# Altium PCB Power.PcbDoc
Units mil, origin at the board's own origin, x right, y up, seen from the top; angles counter-clockwise.
Board outline 1000 x 3520 mil, 2 copper layers (Top Layer, Bottom Layer); 4 components, 4 nets, 18 pads, 0 vias.
Unrouted connection lines stored in the file: 1.
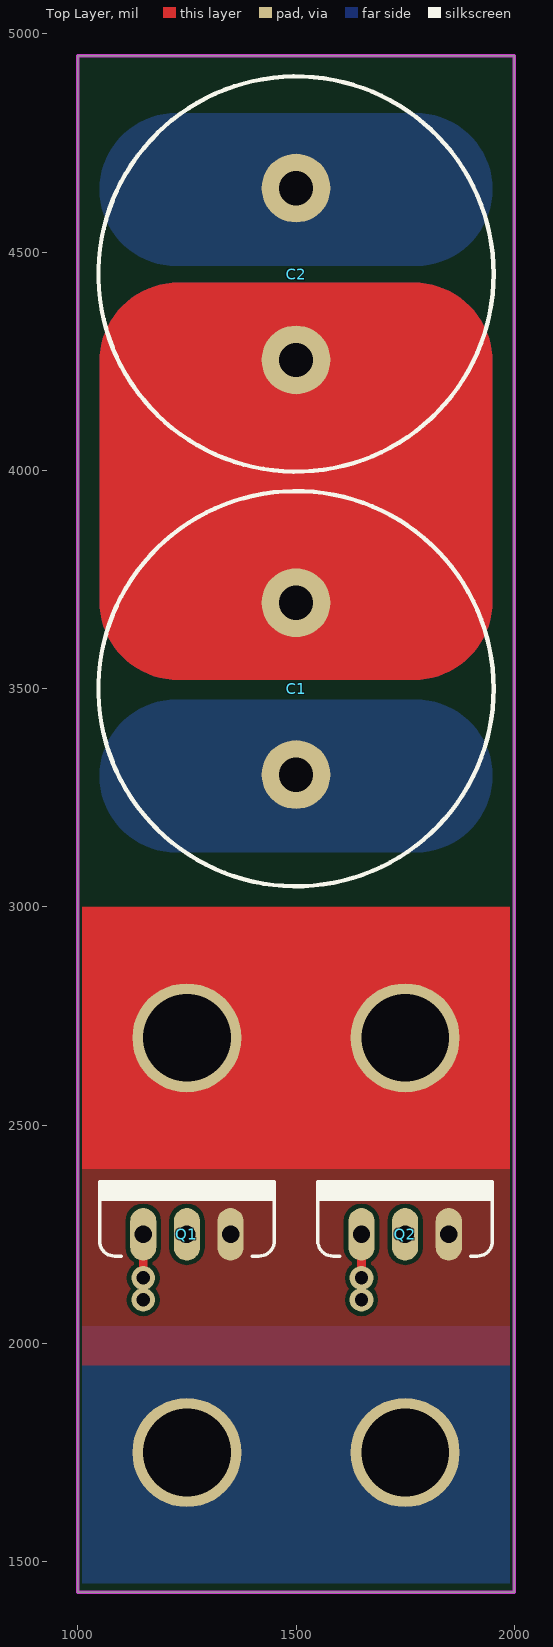
[diagram p0: Top Layer view]
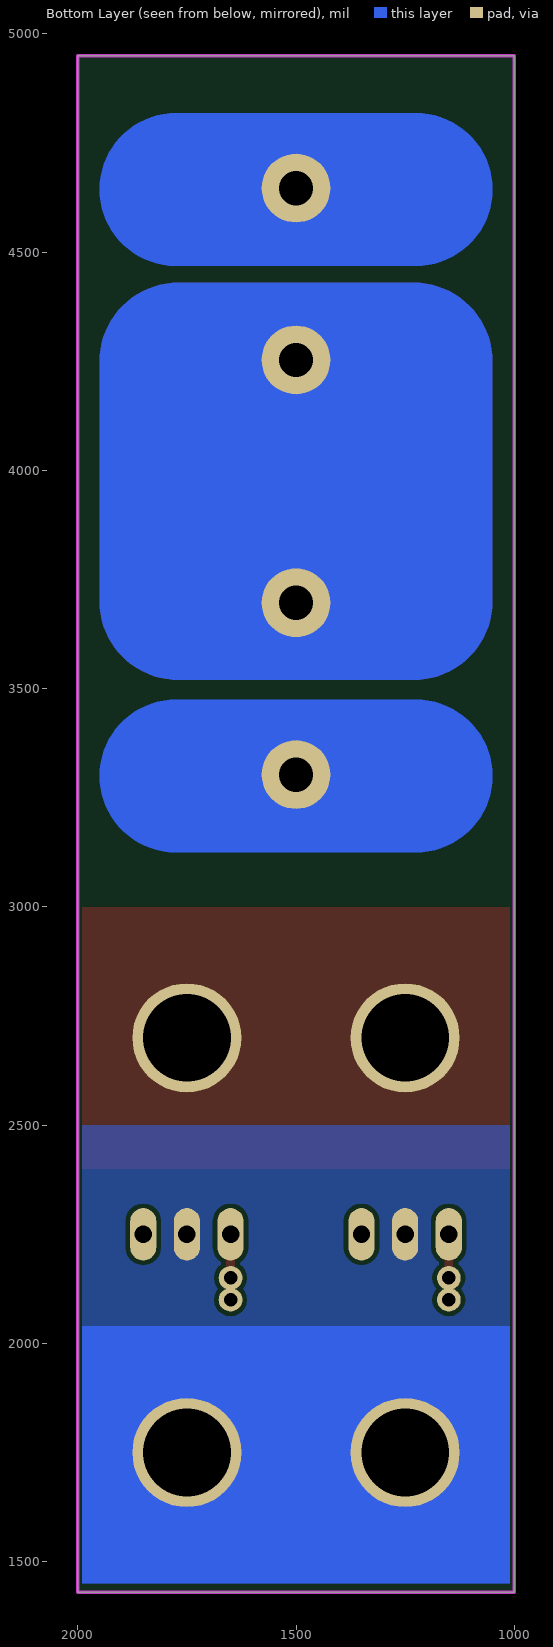
[diagram p1: Bottom Layer view, seen from below]

## Layer stack, top to bottom
Top Solder: solder mask 0.4, Solder Resist, Dk 3.5
Top Layer: signal copper 1.4
Dielectric 1: dielectric 12.6, FR-4, Dk 4.8
Bottom Layer: signal copper 1.4
Bottom Solder: solder mask 0.4, Solder Resist, Dk 3.5

## Board outline
1000,1430 2000,1430 2000,4950 1000,4950

## Design rules (kind name [scope] priority, off if disabled: settings)
Clearance Clearance_1 [All vs OnLayer('Keep-Out Layer')] p1: gap=-10
Clearance [All] p2: gap=10
PolygonConnect [All] p1: connectstyle=Direct reliefconductorwidth=10 reliefentries=4 polygonreliefangle="90 Angle" airgapwidth=10
RoutingVias [All] p1: holewidth=28 width=50 viastyle="Through Hole" minholewidth=28 minwidth=50 maxholewidth=28 maxwidth=50
SolderMaskExpansion [All] p1: expansion=4
Width [All] p1: maxlimit=200 minlimit=10 preferedwidth=10
30 further rules are at their usual default settings.

## Components (designator, comment, footprint, x,y, rotation, side; value= is the part's Value field where it differs from the comment)
C1 "" CAP 1500,3500 r90 top
C2 "" CAP 1500,4450 r90 top
Q1 "MOSFET-N" TO220V 1250,2250 r0 top
Q2 "MOSFET-N" TO220V 1750,2250 r0 top

## Footprints (in the part's own frame and the unit in brackets; to place one, negate y for a bottom-side part, rotate by r counter-clockwise, add the part's x,y. Pads: shape width x height; smd on the part's side, far side on the other; paste and mask are expansions set on the pad)
CAP [mm]
  round 4 hole 2: 1(-5,0) 2(5,0)
  silkscreen extent -11.5,-11.5 11.5,11.5
TO220V [mil]
  oval 60x120 hole 40: 1(-100,0) 2(0,0) 3(100,0)
  silkscreen extent -200,-50 200,120

## Part data
C1 C2: library part CAP, "Polarized Capacitor (Axial)"
Q1 Q2: "N-Channel MOSFET"

## Free pads (board coordinates)
  round 54.33 hole 30.71: 0(1150,2100) 0(1150,2150) 0(1650,2100) 0(1650,2150)
  round 250 hole 201: 1(1250,1750) 1(1250,2700) 1(1750,1750) 1(1750,2700)

## Nets (pads, with @x,y where several pads share a name; then routed paths per layer and width w, separated by ;. In a path a pad name is that pad's centre, name@x,y a point inside that pad or via, vN(x,y) a via of type N, cw(c..) or ccw(c..) an arc to the next point about the centre after c; other vN are vias at no path point)
DRAIN: pad.1@1250,1750 pad.1@1750,1750 Q1.2 Q2.2
GATE: pad.0 Q1.1 Q2.1 | length 300
  Top Layer w20: pad.0@1150,2100 Q1.1 ; pad.0@1650,2100 Q2.1
GND: pad.1@1250,2700 pad.1@1750,2700 Q1.3 Q2.3
NetC1_2: C1.2 C2.1
pads on no net: C1.1 C2.2

## Polygon pours and split planes (outlines as drawn)
GND on Top Layer "GND_L01_P000" (solid, pour order 0): 1010,3000 1990,3000 1990,1950 1010,1950
DRAIN on Bottom Layer "DRAIN_L02_P002" (solid, remove dead copper, pour order 2): 1010,1450 1010,2500 1990,2500 1990,1450

## Keep-outs
Keep-Out Layer:
  the board outline again, w7.87

## Other copper
Top Layer:
  rectangle net GND: 1010,2400 1990,3000
  region net NetC1_2: 1230,4430 1770,4430 cw(c1770,4250) 1950,4250 1950,3700 cw(c1770,3700) 1770,3520 1230,3520 cw(c1230,3700) 1050,3700 1050,4250 cw(c1230,4250)
Bottom Layer:
  rectangle net DRAIN: 1010,1450 1990,2040
  region net NetC1_2: 1770,4430 1230,4430 ccw(c1230,4250) 1050,4250 1050,3700 ccw(c1230,3700) 1230,3520 1770,3520 ccw(c1770,3700) 1950,3700 1950,4250 ccw(c1770,4250)
  region net NetC1_2: 1325,4250 cw(c1500,4250) 1500,4425 cw(c1500,4250) 1674.99,4250 1674.99,3699.81 cw(c1499.99,3700) 1325,3698.01
  region: 1225,3125 cw(c1225,3300) 1050,3300 cw(c1225,3300) 1225,3474.99 1775.19,3474.99 cw(c1775,3299.99) 1776.99,3125
  region: 1225,4468.7 cw(c1225,4643.7) 1050,4643.7 cw(c1225,4643.7) 1225,4818.69 1775.19,4818.69 cw(c1775,4643.69) 1776.99,4468.7